# Altium PCB DC-Motor_Drv.PcbDoc
Units mil, origin at the board's own origin, x right, y up, seen from the top; angles counter-clockwise.
Board outline 1589.53 x 1200 mil, 2 copper layers (Top Layer, Bottom Layer); 53 components, 55 nets, 196 pads, 35 vias.
Unrouted connection lines stored in the file: 115.
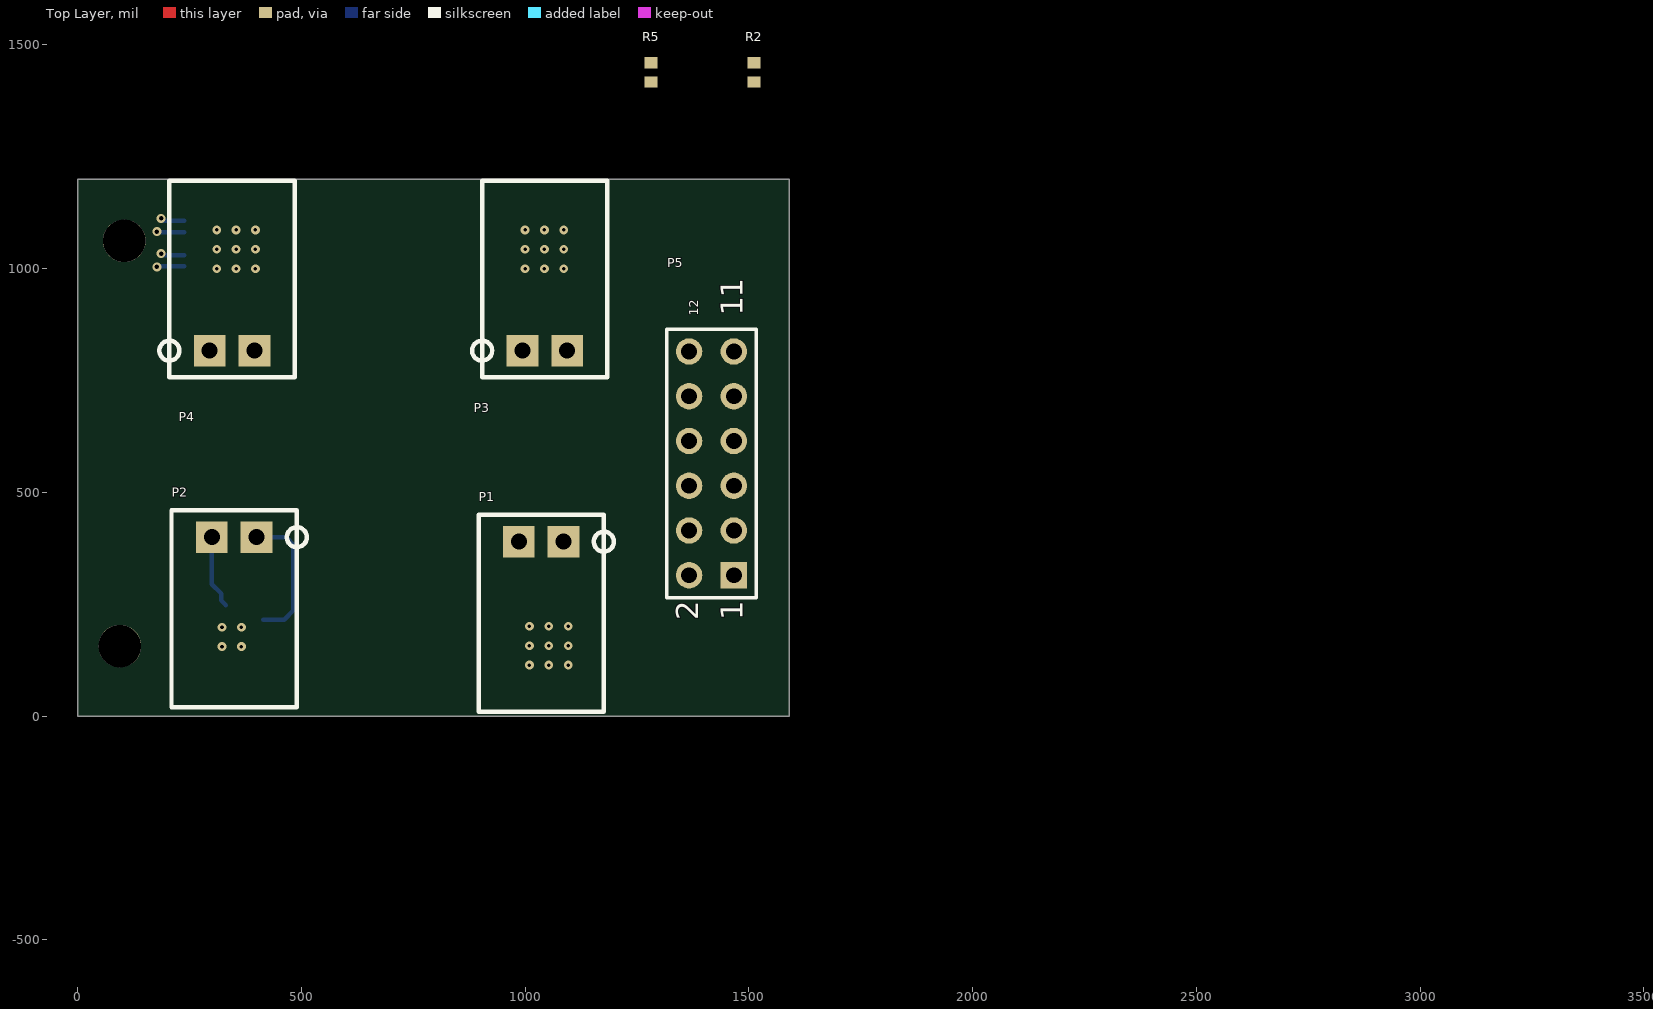
[diagram p0: Top Layer view]
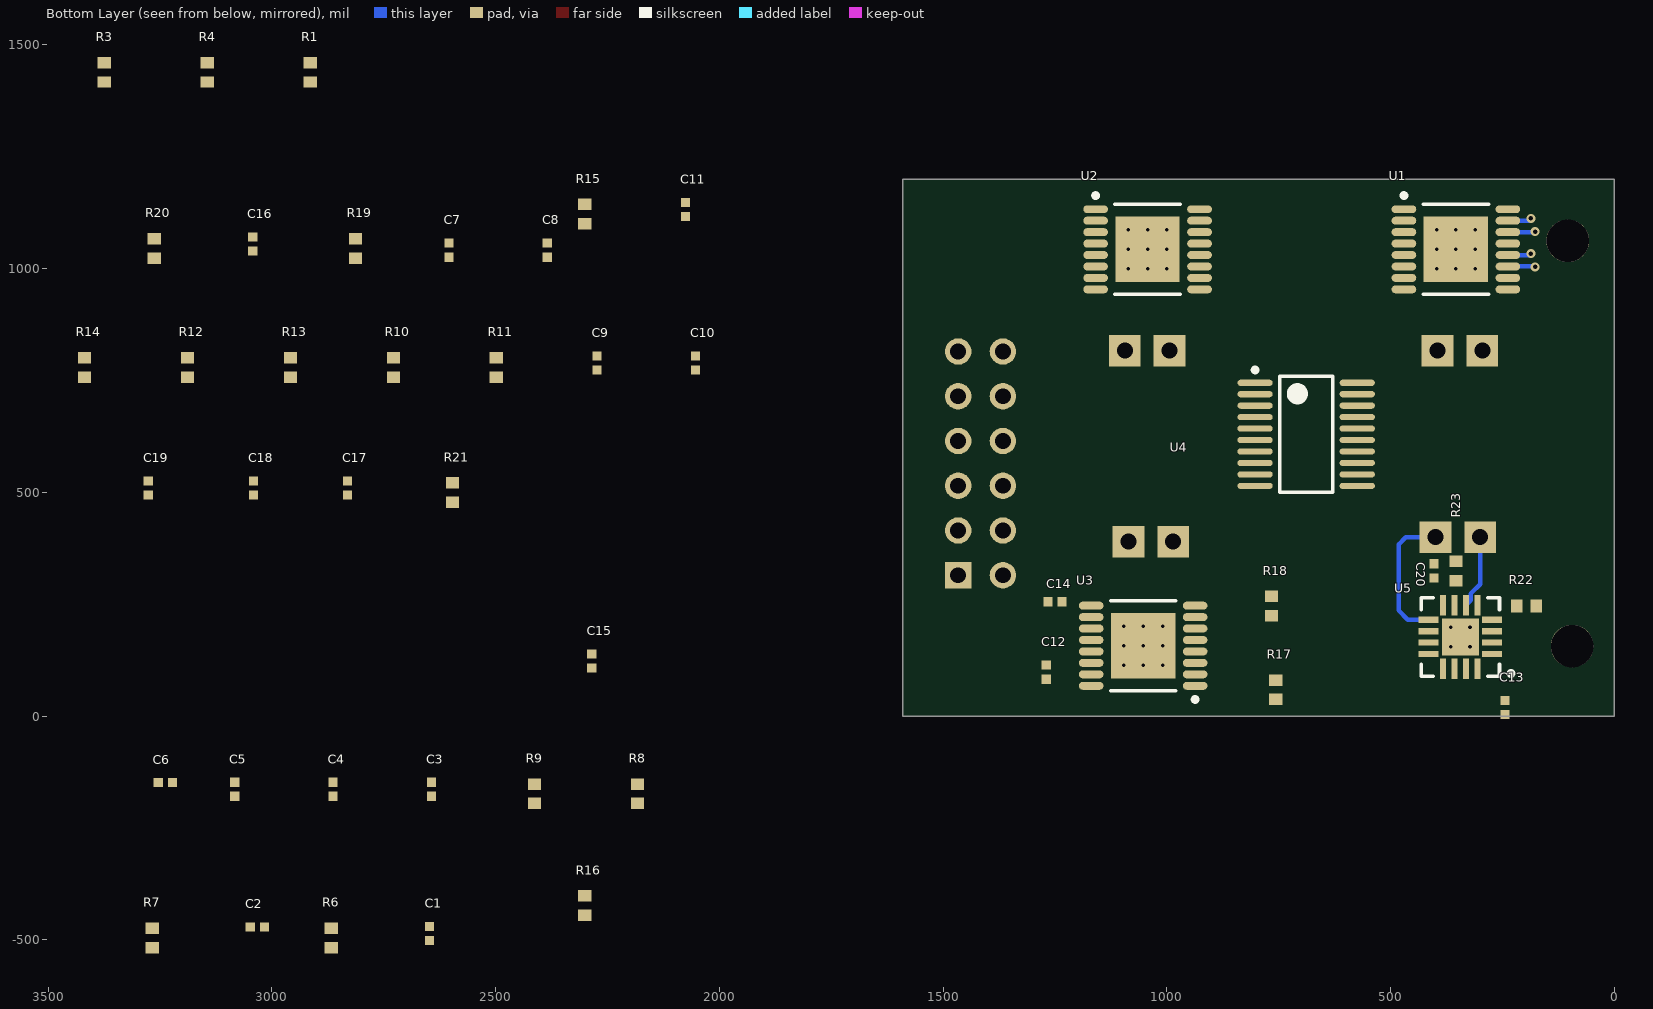
[diagram p1: Bottom Layer view, seen from below]

## Layer stack, top to bottom
Top Solder: solder mask 0.4, Solder Resist, Dk 3.5
Top Layer: signal copper 1.4
Dielectric 1: dielectric 12.6, FR-4, Dk 4.8
Bottom Layer: signal copper 1.4
Bottom Solder: solder mask 0.4, Solder Resist, Dk 3.5

## Board outline
1.02,0 1590.55,0 1590.55,1200 1.02,1200

## Design rules (kind name [scope] priority, off if disabled: settings)
Clearance [All] p1: gap=10 ignorepadtopadclearanceinfootprint=FALSE except(0: Arc-Hole Track-Hole SMDPad-Hole THPad-Hole Via-Hole Fill-Hole Poly-Hole Region-Hole Text-Hole; 3: Arc-SMDPad Arc-THPad Track-SMDPad Track-THPad SMDPad-SMDPad SMDPad-THPad THPad-THPad; 5: Arc-Arc Arc-Track Track-Track)
MinimumSolderMaskSliver [All] p1: minsoldermaskwidth=5
PolygonConnect [All] p1: connectstyle=Relief reliefconductorwidth=10 reliefentries=4 polygonreliefangle="90 Angle" airgapwidth=10
RoutingVias [All] p1: holewidth=28 width=50 viastyle="Through Hole" minholewidth=28 minwidth=50 maxholewidth=28 maxwidth=50
SolderMaskExpansion [All] p1: expansion=4
Width [All] p1: maxlimit=10 minlimit=10 preferedwidth=10
29 further rules are at their usual default settings.

## Components (designator, comment, footprint, x,y, rotation, side; value= is the part's Value field where it differs from the comment)
C1 "33nF" CAPC0402(1005)60_L 2647.6,-485.79 r90 bottom
C2 "33nF" CAPC0402(1005)60_L 3032.6,-470.79 r180 bottom
C3 "0.1uF" CAPC0402(1005)60_L 2643.15,-163.31 r90 bottom
C4 "0.1uF" CAPC0402(1005)60_L 2863.15,-163.31 r90 bottom
C5 "0.1uF" CAPC0402(1005)60_L 3083.15,-163.31 r90 bottom
C6 "0.1uF" CAPC0402(1005)60_L 3238.15,-148.31 r180 bottom
C7 "0.1uF" CAPC0402(1005)60_L 2604.64,1041.42 r90 bottom
C8 "4.7uF" CAPC0402(1005)60_L 2384.64,1041.42 r90 bottom
C9 "0.1uF" CAPC0402(1005)60_L 2273.58,789.37 r90 bottom
C10 "4.7uF" CAPC0402(1005)60_L 2053.58,789.37 r90 bottom
C11 "33nF" CAPC0402(1005)60_L 2076.14,1132.05 r90 bottom
C12 "0.1uF" CAPC0402(1005)60_L 1269.69,98.43 r90 bottom
C13 "0.1uF" CAPC0402(1005)60_L 244.98,19.68 r90 bottom
C14 "0.1uF" CAPC0402(1005)60_L 1250,255.91 r0 bottom
C15 "4.7uF" CAPC0402(1005)60_L 2285.47,123.46 r90 bottom
C16 "33nF" CAPC0402(1005)60_L 3042.95,1055.28 r90 bottom
C17 "0.1uF" CAPC0402(1005)60_L 2831.42,510 r90 bottom
C18 "0.1uF" CAPC0402(1005)60_L 3041.42,510 r90 bottom
C19 "4.7uF" CAPC0402(1005)60_L 3276.42,510 r90 bottom
C20 "0.1uF" CAPC0402(1005)60_L 403.54,324.8 r270 bottom
P1 "IPL1-102-01-F-S-RA-K" IPL1-102-01-F-S-RA-K 1086.02,390 r180 top
P2 "IPL1-102-01-F-S-RA-K" IPL1-102-01-F-S-RA-K 400,400 r180 top
P3 "IPL1-102-01-F-S-RA-K" IPL1-102-01-F-S-RA-K 994.09,816.93 r0 top
P4 "IPL1-102-01-F-S-RA-K" IPL1-102-01-F-S-RA-K 295.28,816.93 r0 top
P5 "Header 6X2" HDR2X6 1466.54,314.96 r90 top
R1 "10K" RESC0402(1005)_M 2914.45,1438.86 r90 bottom
R2 "10K" RESC0402(1005)_M 1511.65,1438.86 r90 top
R3 "10K" RESC0402(1005)_M 3374.45,1438.86 r90 bottom
R4 "10K" RESC0402(1005)_M 3144.45,1438.86 r90 bottom
R5 "10K" RESC0402(1005)_M 1281.65,1438.86 r90 top
R6 "10K" RESC0402(1005)_M 2867.6,-495.79 r90 bottom
R7 "10K" RESC0402(1005)_M 3267.6,-495.79 r90 bottom
R8 "1" RESC0402(1005)_M 2183.15,-173.31 r90 bottom
R9 "1" RESC0402(1005)_M 2413.15,-173.31 r90 bottom
R10 "10K" RESC0402(1005)_M 2728.58,779.37 r90 bottom
R11 "10K" RESC0402(1005)_M 2498.58,779.37 r90 bottom
R12 "10K" RESC0402(1005)_M 3188.58,779.37 r90 bottom
R13 "10K" RESC0402(1005)_M 2958.58,779.37 r90 bottom
R14 "10K" RESC0402(1005)_M 3418.58,779.37 r90 bottom
R15 "10K" RESC0402(1005)_M 2301.14,1122.05 r90 bottom
R16 "1" RESC0402(1005)_M 2301.14,-423.23 r90 bottom
R17 "10K" RESC0402(1005)_M 756.79,59.06 r90 bottom
R18 "10K" RESC0402(1005)_M 766.63,246.06 r90 bottom
R19 "10K" RESC0402(1005)_M 2812.95,1045.28 r90 bottom
R20 "10K" RESC0402(1005)_M 3262.95,1045.28 r90 bottom
R21 "1" RESC0402(1005)_M 2596.42,500 r90 bottom
R22 "10K" RESC0402(1005)_M 196.85,246.06 r0 bottom
R23 "10K" RESC0402(1005)_M 354.33,324.8 r270 bottom
U1 "DRV8801PWPR" DRV8801PWPR 354.33,1043.31 r180 bottom
U2 "DRV8801PWPR" DRV8801PWPR 1043.31,1043.31 r180 bottom
U3 "DRV8801PWPR" DRV8801PWPR 1053.15,157.48 r0 bottom
U4 "MCP2515T-I/ST" TSSOP-ST20_M 688.98,629.92 r180 bottom
U5 "DRV8801QRTYRQ1" DRV8801QRTYRQ1 344.49,177.17 r0 bottom

## Footprints (in the part's own frame and the unit in brackets; to place one, negate y for a bottom-side part, rotate by r counter-clockwise, add the part's x,y. Pads: shape width x height; smd on the part's side, far side on the other; paste and mask are expansions set on the pad)
CAPC0402(1005)60_L [mm] "Chip Capacitor, Body 1.0x0.5mm, Height 0.6mm, IPC High Density"
  rect 0.52x0.52 smd: 1(-0.4,0) 2(0.4,0)
  body extent -0.55,-0.3 0.55,0.3, height 0.6
DRV8801PWPR [mm] "IC MOTOR DRIVER PAR 16HTSSOP"
  oval 1.4x0.45 smd: 1(-2.95,2.275) 2(-2.95,1.625) 3(-2.95,0.975) 4(-2.95,0.325) 5(-2.95,-0.325) 6(-2.95,-0.975) 7(-2.95,-1.625) 8(-2.95,-2.275) 9(2.95,-2.275) 10(2.95,-1.625) 11(2.95,-0.975) 12(2.95,-0.325) 13(2.95,0.325) 14(2.95,0.975) 15(2.95,1.625) 16(2.95,2.275)
  rect 3.65x3.7 smd: 17(0,0)
  silkscreen extent -3.08,-2.55 1.85,3.17, body extent -3.2,-2.55 3.2,2.55, height 1.2
DRV8801QRTYRQ1 [mm]
  rect 1.15x0.35 smd: 1(-1.8,0.975) 2(-1.8,0.325) 3(-1.8,-0.325) 4(-1.8,-0.975) 9(1.8,-0.975) 10(1.8,-0.325) 11(1.8,0.325) 12(1.8,0.975)
  rect 0.35x1.15 smd: 5(-0.975,-1.8) 6(-0.325,-1.8) 7(0.325,-1.8) 8(0.975,-1.8) 13(0.975,1.8) 14(0.325,1.8) 15(-0.325,1.8) 16(-0.975,1.8)
  rect 2.1x2.1 smd: 17(0,0)
  silkscreen extent -3,-2.23 2.23,2.22, body extent -2.08,-2.09 2.08,2.08, height 0.75
HDR2X6 [mm] "Connector; Header; 6x2 Position"
  rect 1.5x1.5 hole 0.9: 1(0,0)
  round 1.5 hole 0.9: 2(0,2.54) 3(2.54,0) 4(2.54,2.54) 5(5.08,0) 6(5.08,2.54) 7(7.62,0) 8(7.62,2.54) 9(10.16,0) 10(10.16,2.54) 11(12.7,0) 12(12.7,2.54)
  silkscreen extent -1.27,-1.27 13.97,3.81
IPL1-102-01-F-S-RA-K [mm] ".100 TERMINAL ASSEMBLY"
  rect 1.8x1.8 hole 0.91: 1(0,0) 2(2.54,0)
  silkscreen extent -2.85,-1.52 4.83,9.65, body extent -2.03,-0.25 4.57,9.4, height 6.56
RESC0402(1005)_M [mm] "Chip Resistor, Body 1.0x0.5mm, IPC Low Density"
  rect 0.65x0.75 smd: 1(-0.55,0) 2(0.55,0)
  body extent -0.52,-0.28 0.53,0.28, height 0.4
TSSOP-ST20_M [mm] "TSOP, 20-Leads, Body 6.5x4.4mm, Pitch 0.65mm, IPC Low Density"
  oval 2x0.35 smd: 1(-2.9,2.925) 2(-2.9,2.275) 3(-2.9,1.625) 4(-2.9,0.975) 5(-2.9,0.325) 6(-2.9,-0.325) 7(-2.9,-0.975) 8(-2.9,-1.625) 9(-2.9,-2.275) 10(-2.9,-2.925) 11(2.9,-2.925) 12(2.9,-2.275) 13(2.9,-1.625) 14(2.9,-0.975) 15(2.9,-0.325) 16(2.9,0.325) 17(2.9,0.975) 18(2.9,1.625) 19(2.9,2.275) 20(2.9,2.925)
  silkscreen extent -3.03,-3.3 1.5,3.77, body extent -2.25,-3.3 2.25,3.3, height 1.2

## Part data
C1 C2 C3 C4 C5 C6 C7 C8 C9 C10 C11 C12 C13 C14 C15 C16 C17 C18 C19 C20: library part CMP-1034-00252-1, "CAP CER 0.1UF 10V X7R 0402", Manufacturer="Murata Electronics North America", Manufacturer Part Number=GRM155R71A104KA01D, Operating Temperature="-55°C ~ 125°C", Package / Case="0402 (1005 Metric)", Ratings=-, Supplier Part Number 1=490-6321-1-ND, Temperature Coefficient=X7R, Tolerance=±10%, Voltage - Rated=10V, Applications="General Purpose", Category=Capacitors, ComponentLink1Description=http://www.murata.com/~/media/webrenewal/support/library/catalog/products/capacitor/mlcc/c02e.ashx?la=en-us, ComponentLink1URL=http://www.murata.com/~/media/webrenewal/support/library/catalog/products/capacitor/mlcc/c02e.ashx?la=en-us, Features=-, Height - Seated (Max)=-, Lead Spacing=-, Mounting Type="Surface Mount, MLCC", Packaging="Cut Tape (CT)", Part Status=Active, Pricing 1="1=0.1, 10=0.014, 100=0.0063, 500=0.00446, 1000=0.00351, 2500=0.00319, 5000=0.00293 (USD)", RoHS="RoHS Compliant", Size / Dimension="0.039\" L x 0.020\" W (1.00mm x 0.50mm)", Stock 1=2920395, Supplier 1=Digi-Key, Thickness (Max)="0.022\" (0.55mm)"
P5: "Header, 6-Pin, Dual row", LatestRevisionDate=17-Jul-2002, LatestRevisionNote="Re-released for DXP Platform.", Publisher="Altium Limited"
R1 R2 R3 R4 R5 R6 R7 R8 R9 R10 R11 R12 R13 R14 R15 R16 R17 R18 R19 R20 R21 R22 R23: library part CMP-1011-00651-1
U1 U2 U3: Base Part Number=DRV8801, Current - Output=2.8A, Manufacturer="Texas Instruments", Operating Temperature="-40°C ~ 150°C (TJ)", Package / Case="16-TSSOP (0.173\", 4.40mm Width) Exposed Pad", Supplier Device Package=16-HTSSOP, Supplier Part Number 1=296-25378-1-ND, Voltage - Load="8 V ~ 38 V", Applications="General Purpose", Category="Integrated Circuits (ICs)", ComponentLink1Description=http://www.ti.com/lit/ds/symlink/drv8801.pdf, ComponentLink1URL=http://www.ti.com/lit/ds/symlink/drv8801.pdf, Function="Driver - Fully Integrated, Control and Power Stage", Interface=Parallel, Manufacturer Part Number=DRV8801PWPR, Motor Type - AC, DC="Brushed DC", Motor Type - Stepper=Bipolar, Mounting Type="Surface Mount", Output Configuration="Half Bridge (2)", Packaging="Cut Tape (CT)", Part Status=Active, Pricing 1="1=2.37, 10=2.126, 100=1.709, 500=1.40414, 1000=1.16344 (USD)", RoHS="RoHS Compliant", Step Resolution=-, Stock 1=40424, Supplier 1=Digi-Key, Technology=DMOS, Voltage - Supply="8 V ~ 38 V"
U4: library part CMP-0186-00079-2, "Stand-Alone CAN Controller With SPI Interface, 20-Pin TSSOP, Industrial Temperature, Tape and Reel", Code_JEDEC=MO-153-AC, ComponentLink1Description="Manufacturer URL", ComponentLink1URL=http://www.microchip.com/, ComponentLink2Description=Datasheet, ComponentLink2URL=http://ww1.microchip.com/downloads/en/DeviceDoc/21801f.pdf, ComponentLink3Description="Package Specification", ComponentLink3URL=http://www.microchip.com/stellent/groups/techpub_sg/documents/packagingspec/en012702.pdf, DatasheetVersion="revF, Oct-2010", PackageDescription="20-Lead Plastic Thin Shrink Small Outline (ST) - 4.4mm Body [TSSOP]", PackageReference=TSSOP-ST20, PackageVersion="revBB, Aug-2009", RevisionNote="URLs added. DatasheetVersion updated."
U5: Base Part Number=DRV8801, Current - Output=2.8A, Manufacturer="Texas Instruments", Operating Temperature="-40°C ~ 150°C (TJ)", Package / Case="16-WQFN Exposed Pad", Supplier Device Package="16-QFN (3x4)", Supplier Part Number 1=296-36582-1-ND, Voltage - Load="8 V ~ 38 V", Applications="General Purpose", Category="Integrated Circuits (ICs)", ComponentLink1Description=http://www.ti.com/lit/ds/symlink/drv8801-q1.pdf, ComponentLink1URL=http://www.ti.com/lit/ds/symlink/drv8801-q1.pdf, Function="Driver - Fully Integrated, Control and Power Stage", Interface=Parallel, Manufacturer Part Number=DRV8801QRTYRQ1, Motor Type - AC, DC="Brushed DC", Motor Type - Stepper=Bipolar, Mounting Type="Surface Mount", Output Configuration="Half Bridge (2)", Packaging="Cut Tape (CT)", Part Status=Active, Pricing 1="1=3.31, 10=2.976, 100=2.4383, 500=2.0757, 1000=1.75059 (USD)", RoHS="RoHS Compliant", Step Resolution=-, Stock 1=3214, Supplier 1=Digi-Key, Technology=DMOS, Voltage - Supply="8 V ~ 38 V"

## Free pads (board coordinates)
  round 95 hole 95 unplated: ""(94.53,156.73) ""(104.37,1062.24)

## Via types
v1: diameter 19.68, hole 7.87, Top Layer to Bottom Layer, 31 vias
v2: diameter 20, hole 10, Top Layer to Bottom Layer, 4 vias

## Nets (pads, with @x,y where several pads share a name; then routed paths per layer and width w, separated by ;. In a path a pad name is that pad's centre, name@x,y a point inside that pad or via, vN(x,y) a via of type N, cw(c..) or ccw(c..) an arc to the next point about the centre after c; other vN are vias at no path point)
+3.3: R1.2 R2.2 R3.2 R4.2 R5.2 R19.2
+12: C3.2 C4.2 C7.2 C9.2 C12.2 C14.2 C18.2 C20.1 R8.2 R9.2 R16.2 R21.2 U1.14 U2.14 U3.14 U5.13 | length 60
  Bottom Layer w10: v2@178.15,1081.69 U1.14
  other v2: 177.17,1082.68
BREAK: R2.1 U1.2 U2.2 U3.2 U5.16
BRK: R5.1 U1.16 U2.16 U3.16 U5.5
CS: C1.1 C2.1 C11.1 C16.1 R6.2 R7.2 R15.2 R20.2
Encoder_CS0: U4.18
GND: C1.2 C2.2 C3.1 C4.1 C8.1 C10.1 C11.2 C12.1 C15.1 C16.2 C18.1 C19.1 R10.1 R11.1 R12.1 R13.1 R17.1 R18.1 R22.1 U1.4 U1.13 U2.4 U2.13 U3.4 U3.13 U5.2 U5.12
NetC5_1: C5.1 U1.11 | length 60
  Bottom Layer w10: v2@178.15,1004.92 U1.11
  other v2: 177.17,1003.94
NetC5_2: C5.2 U1.12 | length 48.2
  Bottom Layer w10: v2@189.96,1030.51 U1.12
  other v2: 187.01,1033.46
NetC6_1: C6.1 U2.11
NetC6_2: C6.2 U2.12
NetC7_1: C7.1 U1.9
NetC8_2: C8.2 R8.1
NetC9_1: C9.1 U2.9
NetC10_2: C10.2 R9.1
NetC13_1: C13.1 U3.11
NetC13_2: C13.2 U3.12
NetC14_1: C14.1 U3.9
NetC15_2: C15.2 R16.1
NetC17_1: C17.1 U5.10
NetC17_2: C17.2 U5.11
NetC19_2: C19.2 R21.1
NetC20_2: C20.2 U5.8
NetP1_1: P1.1 U3.10
NetP1_2: P1.2 U3.7
NetP2_1: P2.1 U5.9 | length 312.1
  Bottom Layer w10: P2.1 466.14,400 482.28,383.86 482.28,236.22 461.61,215.55 U5.9
NetP2_2: P2.2 U5.6 | length 165.1
  Bottom Layer w10: P2.2 300,294.98 320.99,273.98 320.99,258.73 U5.6
NetP3_1: P3.1 U2.10
NetP3_2: P3.2 U2.7
NetP4_1: P4.1 U1.10
NetP4_2: P4.2 U1.7
NetP5_1: P5.1 R1.1 U1.1
NetP5_2: P5.2 R4.1 U2.1
NetP5_3: P5.3 U1.3
NetP5_4: P5.4 U2.3
NetP5_5: P5.5 R10.2 U1.6
NetP5_6: P5.6 R12.2 U2.6
NetP5_7: P5.7 R19.1 U5.15
NetP5_8: P5.8 R14.1 U3.1
NetP5_9: P5.9 U5.1
NetP5_10: P5.10 U3.3
NetP5_11: P5.11 R22.2 U5.4
NetP5_12: P5.12 R17.2 U3.6
NetR6_1: R6.1 U1.15 | length 46.3
  Bottom Layer w10: v2@191.93,1107.28 U1.15
  other v2: 187.01,1112.2
NetR7_1: R7.1 U2.15
NetR11_2: R11.2 U1.8
NetR13_2: R13.2 U2.8
NetR15_1: R15.1 U3.15
NetR18_2: R18.2 U3.8
NetR20_1: R20.1 U5.14
NetR23_2: R23.2 U5.7
SLEEP: R3.1 U1.5 U2.5 U3.5 U5.3
SPI0_MISO: U4.17
SPI0_MOSI: U4.16
SPI0_SCLK: U4.14
pads on no net: R14.2 R23.1 U1.17 U2.17 U3.17 U4.1 U4.2 U4.3 U4.4 U4.5 U4.6 U4.7 U4.8 U4.9 U4.10 U4.11 U4.12 U4.13 U4.15 U4.19 U4.20 U5.17
copper on no net:
  other v1: 1009.84,114.17 1053.15,114.17 1096.46,114.17 322.83,155.51 366.14,155.51 1009.84,157.48 1053.15,157.48 1096.46,157.48 322.83,198.82 366.14,198.82 1009.84,200.79 1053.15,200.79 1096.46,200.79 311.02,1000 354.33,1000 397.64,1000 1000,1000 1043.31,1000 1086.61,1000 311.02,1043.31 354.33,1043.31 397.64,1043.31 1000,1043.31 1043.31,1043.31 1086.61,1043.31 311.02,1086.61 354.33,1086.61 397.64,1086.61 1000,1086.61 1043.31,1086.61 1086.61,1086.61

## Dimensions
1.02,-10 to 0,1190.94 on Mechanical 13
1.02,0 to 1590.55,0 on Mechanical 13

## Text inside footprints (layer, text, board x,y; h text height)
P5: Top Overlay "12" at 1386.54,894.96 h20 r90; Top Overlay "1" at 1486.54,934.96 h50 r90; Top Overlay "1" at 1486.54,894.96 h50 r90; Top Overlay "1" at 1486.54,214.96 h50 r90; Top Overlay "2" at 1386.54,214.96 h50 r90